# Altium PCB PCB1.PcbDoc
Units mm, origin at the board's own origin, x right, y up, seen from the top; angles counter-clockwise.
Board outline 82.4 x 40.4 mm, 2 copper layers (Top Layer, Bottom Layer); 44 components, 28 nets, 193 pads, 28 vias.
Unrouted connection lines stored in the file: 8.
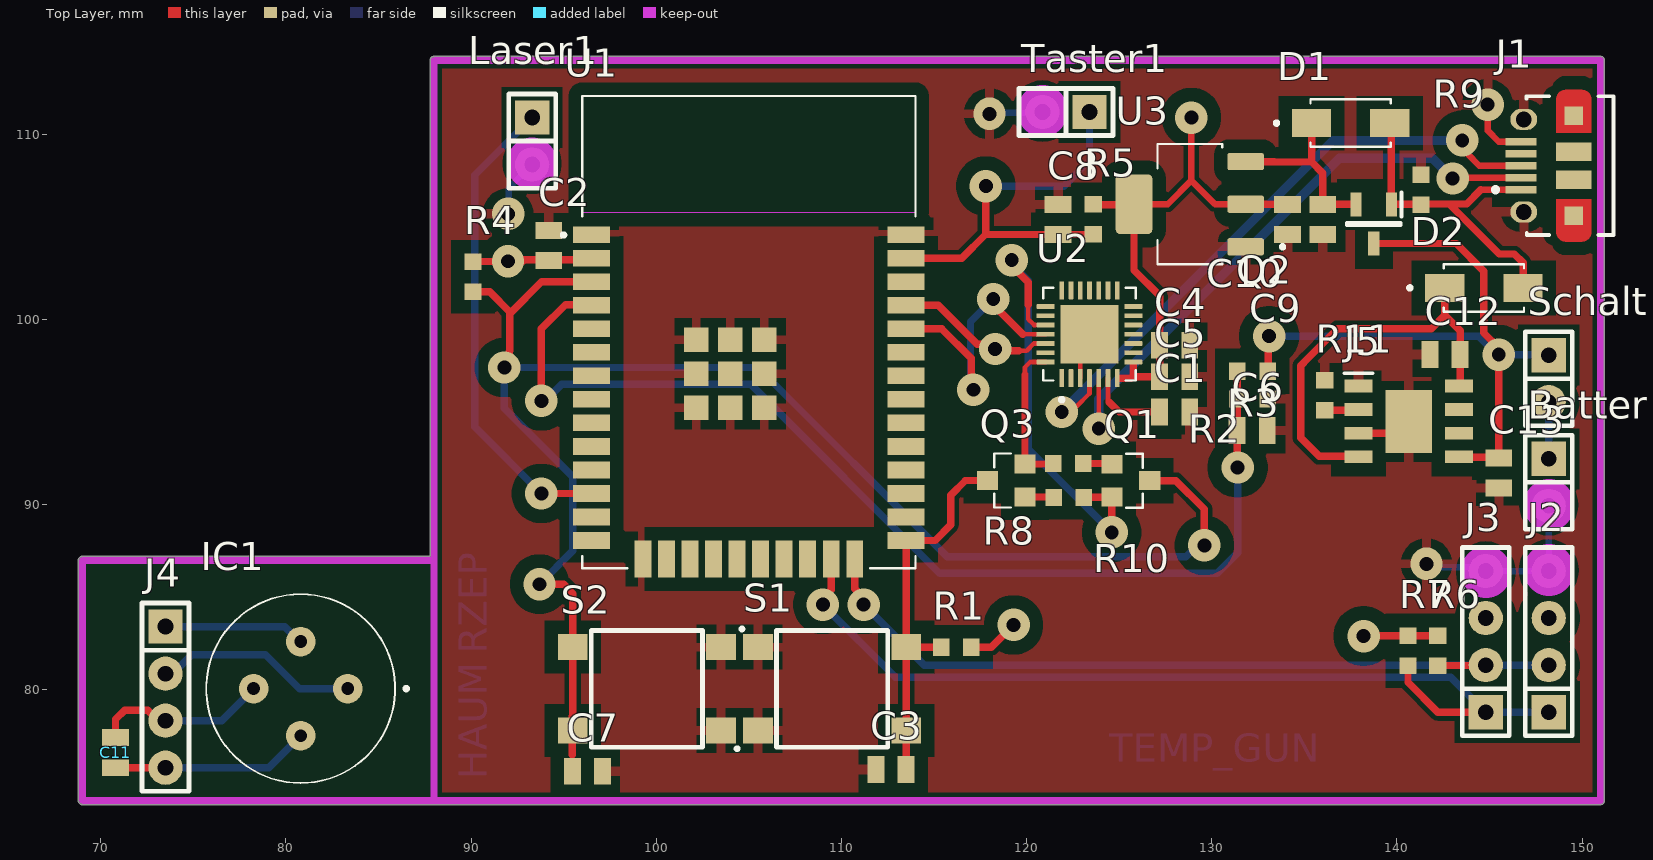
[diagram p0: Top Layer view]
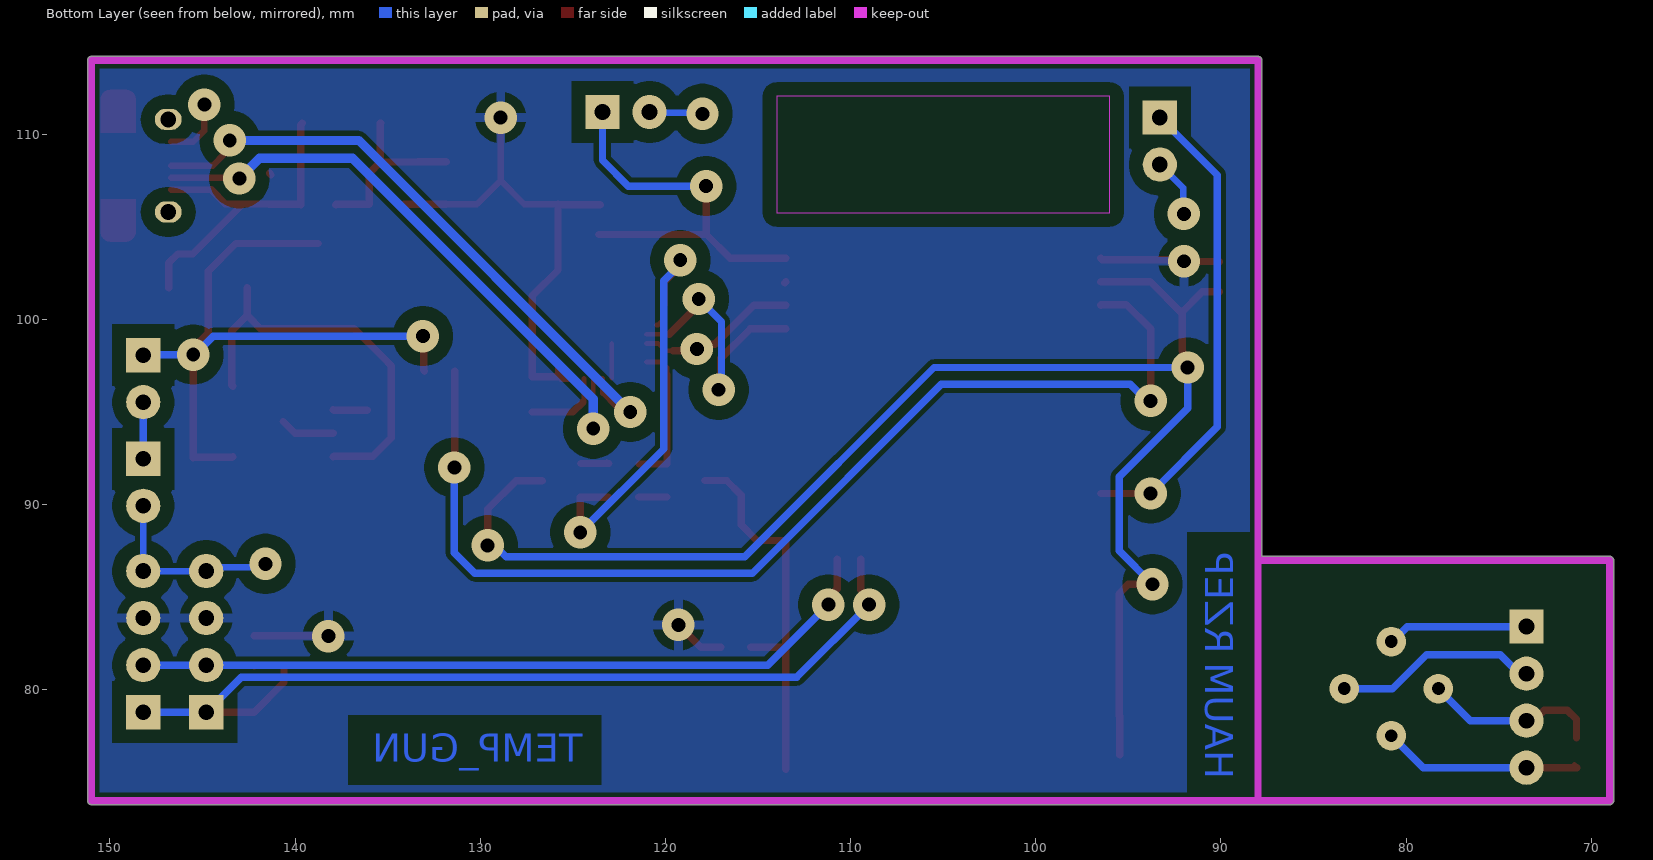
[diagram p1: Bottom Layer view, seen from below]
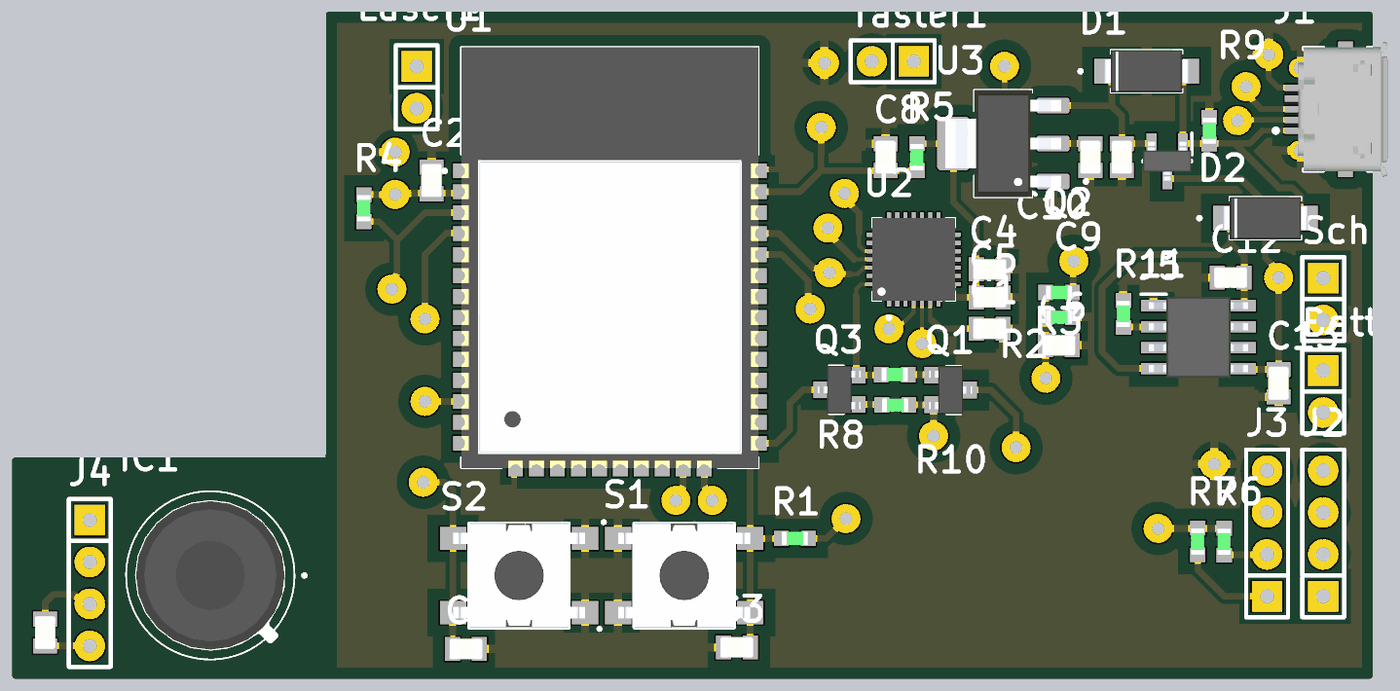
[diagram p2: 3D render of the assembled board from above, using the file's embedded part models]

## Layer stack, top to bottom
Top Solder: solder mask 0.0102, Solder Resist, Dk 3.5
Top Layer: signal copper 0.0356
Dielectric 1: dielectric 0.32, FR-4, Dk 4.8
Bottom Layer: signal copper 0.0356
Bottom Solder: solder mask 0.0102, Solder Resist, Dk 3.5

## Board outline
68.8,74 68.8,87 cw(c69,87) 69,87.2 87.8,87.2 87.8,114 cw(c88,114) 88,114.2 151,114.2 cw(c151,114) 151.2,114 151.2,74 cw(c151,74) 151,73.8 101,73.8 69,73.8 cw(c69,74)

## Design rules (kind name [scope] priority, off if disabled: settings)
Clearance [All] p1: gap=0.74 ignorepadtopadclearanceinfootprint=FALSE except(0.25: Arc-Arc Arc-Track Arc-SMDPad Arc-THPad Arc-Via Arc-Fill Arc-Poly Arc-Region Arc-Text Arc-Hole Track-Track Track-SMDPad Track-THPad Track-Via Track-Fill Track-Poly Track-Region Track-Text Track-Hole; 0.37: SMDPad-SMDPad SMDPad-THPad SMDPad-Via SMDPad-Text SMDPad-Hole THPad-THPad THPad-Via THPad-Text THPad-Hole Via-Via Via-Text Via-Hole Text-Text Text-Hole)
MinimumAnnularRing [All] p1: minimumring=0.5
PlaneConnect PlaneConnect_1 [IsPad AND GND] p1: planeconnectstyle=NoConnect reliefexpansion=0.508 reliefentries=4 reliefconductorwidth=0.254 reliefairgap=0.254
PlaneConnect [All] p2: planeconnectstyle=Relief reliefexpansion=0.508 reliefentries=4 reliefconductorwidth=0.254 reliefairgap=0.254
PolygonConnect [All] p1: connectstyle=Relief reliefconductorwidth=0.5 reliefentries=4 polygonreliefangle="90 Angle" airgapwidth=0.5
RoutingVias [All] p1: holewidth=0.85 width=1.45 viastyle="Through Hole" minholewidth=0.65 minwidth=1.25 maxholewidth=1.45 maxwidth=2.05
SolderMaskExpansion [All] p1: expansion=0.102 istentingtop=FALSE
Width [All] p1: maxlimit=6 minlimit=0.25 preferedwidth=0.4
29 further rules are at their usual default settings.

## Components (designator, comment, footprint, x,y, rotation, side; value= is the part's Value field where it differs from the comment)
Batterie1 "CON2" SIP-2 148.2,91.2 r270 top
C1 "1uF" CAPC2013X140N 128,95 r180 top
C2 "47uF" CAPC2013X140N 94.2,103.987 r270 top
C3 "10nF" CAPC2013X140N 112.687,75.7 r0 top
C4 "10uF" CAPC2013X140N 128,98.6 r0 top
C5 "100nF" CAPC2013X140N 128,96.9 r0 top
C6 "10nF" CAPC2013X140N 132.187,94 r180 top
C7 "10nF" CAPC2013X140N 96.287,75.6 r180 top
C8 "10nF" CAPC2013X140N 121.7,105.4 r270 top
C9 "47uF" CAPC2013X140N 136,105.4 r90 top
C10 "10uF" CAPC2013X140N 134.1,105.4 r90 top
C11 "0.1uF" CAPC2013X140N 70.8,76.6 r90 top
C12 "10uF" CAPC2013X140N 142.6,98.1 r0 top
C13 "10uF" CAPC2013X140N 145.5,91.7 r90 top
D1 "SS14" DIOM4325X250N 137.5,110.6 r0 top
D2 "SS14" DIOM4325X250N 144.7,101.7 r0 top
IC1 "MLX90614ESF-DCC-000-SP" MLX90614ESFDCC000SP 83.34,80.06 r270 top
J1 "47589-0001" "USB-MICRO-B_V - RZEP_CN" 148.2,108.3 r90 top
J2 "DISPLAY" Sip-4 148.2,82.6 r90 top
J3 "SENSOR" Sip-4 144.8,82.6 r90 top
J4 "CON4" Sip-4 73.5,79.6 r270 top
J5 "TP4056" SOIC127P600X175-9N 140.642,94.487 r0 top
Laser1 "CON2" SIP-2 93.3,109.63 r270 top
Q1 "SMD-TRANSISTORS-NPN-25V-500MW(SOT-23)" SOT-23 125.633,91.292 r270 top
Q2 "SI2351DS-T1-E3" SOT95P237X112-3N 138.75,105.15 r270 top
Q3 "SMD-TRANSISTORS-NPN-25V-500MW(SOT-23)" SOT-23 118.9,91.3 r90 top
R1 "24k" RESC1608X55N 116.2,82.3 r180 top
R2 "1M" RESC1608X55N 132.2,97.2 r0 top
R3 "1M" RESC1608X55N 132.2,95.7 r180 top
R4 "24k" RESC1608X55N 90.1,102.3 r270 top
R5 "24k" RESC1608X55N 123.6,105.4 r270 top
R6 "24k" RESC1608X55N 142.2,82.1 r270 top
R7 "24k" RESC1608X55N 140.6,82.114 r270 top
R8 "12k" RESC1608X55N 122.249,92.219 r180 top
R9 "24k" RESC1608X55N 141.3,107 r270 top
R10 "12k" RESC1608X55N 122.28,90.385 r0 top
R11 "2k4" RESC1608X55N 136.1,95.9 r270 top
S1 "B3FS-1000P" B3FS-1000P 109.5,80.05 r180 top
S2 "B3FS-1000P" B3FS-1000P 99.5,80.05 r0 top
Schalter1 "CON2" SIP-2 148.2,96.8 r270 top
Taster1 "CON2" SIP-2 122.13,111.2 r180 top
U1 "ESP32-WROOM-32" MODULE_ESP32-WROOM-32 105,99.31 r0 top
U2 "CP2102" QFN50P500X500X100-29N 123.4,99.2 r90 top
U3 "LDL1117S12R" SOT230P700X180-4N 128.819,106.22 r180 top

## Footprints (in the part's own frame and the unit in brackets; to place one, negate y for a bottom-side part, rotate by r counter-clockwise, add the part's x,y. Pads: shape width x height; smd on the part's side, far side on the other; paste and mask are expansions set on the pad)
B3FS-1000P [mm]
  rect 1.6x1.4 smd: 1(4,-2.25) 2(-4,-2.25) 3(4,2.25) 4(-4,2.25)
  silkscreen extent -3,-3.29 4.93,3.15, body extent -4,-3.25 4,3.25, height 3.1
CAPC2013X140N [mil]
  rect 36x57 smd: 1(-32,0) 2(32,0)
  body extent -40,-25 40,25, height 53
DIOM4325X250N [mm]
  rect 2.12x1.5 smd: A(2.115,0) C(-2.115,0)
  silkscreen extent -4.1,-1.28 2.16,1.28, body extent -2.57,-1.28 2.57,1.28, height 2.5
MLX90614ESFDCC000SP [mm]
  round 1.6 hole 0.69: 1(0,0) 2(-2.54,-2.54) 3(0,-5.08) 4(2.54,-2.54)
  silkscreen extent -5.1,-7.64 5.1,3.26, body extent -4.56,-7.1 4.56,2.02, height 17.35
MODULE_ESP32-WROOM-32 [mm]
  rect 2x0.9 smd: 1(-8.5,5.26) 2(-8.5,3.99) 3(-8.5,2.72) 4(-8.5,1.45) 5(-8.5,0.18) 6(-8.5,-1.09) 7(-8.5,-2.36) 8(-8.5,-3.63) 9(-8.5,-4.9) 10(-8.5,-6.17) 11(-8.5,-7.44) 12(-8.5,-8.71) 13(-8.5,-9.98) 14(-8.5,-11.25) 25(8.5,-11.25) 26(8.5,-9.98) 27(8.5,-8.71) 28(8.5,-7.44) 29(8.5,-6.17) 30(8.5,-4.9) 31(8.5,-3.63) 32(8.5,-2.36) 33(8.5,-1.09) 34(8.5,0.18) 35(8.5,1.45) 36(8.5,2.72) 37(8.5,3.99) 38(8.5,5.26)
  rect 0.9x2 smd: 15(-5.715,-12.25) 16(-4.445,-12.25) 17(-3.175,-12.25) 18(-1.905,-12.25) 19(-0.635,-12.25) 20(0.635,-12.25) 21(1.905,-12.25) 22(3.175,-12.25) 23(4.445,-12.25) 24(5.715,-12.25)
  rect 1.33x1.33 smd: 39(-2.835,-4.075) 39(-2.835,-2.24) 39(-2.835,-0.405) 39(-1,-4.075) 39(-1,-2.24) 39(-1,-0.405) 39(0.835,-4.075) 39(0.835,-2.24) 39(0.835,-0.405)
  Keep-Out Layer region: 9,6.45 -9,6.45 -9,12.75 9,12.75
  Keep-Out Layer region: 9,6.45 -9,6.45 -9,12.75 9,12.75
  silkscreen extent -10.1,-12.75 9,12.75, body extent -9,-12.75 9,12.75, height 3.2
QFN50P500X500X100-29N [mm]
  rrect25% 0.97x0.26 smd: 1(-2.37,1.5) 2(-2.37,1) 3(-2.37,0.5) 4(-2.37,0) 5(-2.37,-0.5) 6(-2.37,-1) 7(-2.37,-1.5) 15(2.37,-1.5) 16(2.37,-1) 17(2.37,-0.5) 18(2.37,0) 19(2.37,0.5) 20(2.37,1) 21(2.37,1.5)
  rrect25% 0.26x0.97 smd: 8(-1.5,-2.37) 9(-1,-2.37) 10(-0.5,-2.37) 11(0,-2.37) 12(0.5,-2.37) 13(1,-2.37) 14(1.5,-2.37) 22(1.5,2.37) 23(1,2.37) 24(0.5,2.37) 25(0,2.37) 26(-0.5,2.37) 27(-1,2.37) 28(-1.5,2.37)
  rect 3.15x3.15 smd paste-575: 29(0,0)
  silkscreen extent -3.64,-2.5 2.5,2.5, body extent -2.5,-2.5 2.5,2.5, height 1
RESC1608X55N [mm]
  rect 0.89x0.93 smd: 1(-0.814,0) 2(0.814,0)
  body extent -0.8,-0.4 0.8,0.4, height 0.55
SIP-2 [mm]
  rect 1.85x1.85 hole 0.85: 1(-1.27,0)
  round 1.85 hole 0.85: 2(1.27,0)
  silkscreen extent -2.54,-1.27 2.54,1.27
Sip-4 [mm]
  rect 1.85x1.85 hole 0.85: 1(-3.81,0)
  round 1.85 hole 0.85: 2(-1.27,0) 3(1.27,0) 4(3.81,0)
  silkscreen extent -5.08,-1.27 5.08,1.27
SOIC127P600X175-9N [mm]
  rect 1.525x0.7 smd: 1(-2.712,1.905) 2(-2.712,0.635) 3(-2.712,-0.635) 4(-2.712,-1.905) 5(2.712,-1.905) 6(2.712,-0.635) 7(2.712,0.635) 8(2.712,1.905)
  rect 2.513x3.402 smd: 9(0,0)
  silkscreen extent -3.47,2.61 -1.95,2.61, body extent -3,-2.45 3,2.45, height 1.75
SOT95P237X112-3N [mm]
  rect 1.3x0.6 smd: 1(-1.05,0.95) 2(-1.05,-0.95) 3(1.05,0)
  silkscreen extent -1.7,-1.46 0.05,1.5, body extent -1.18,-1.46 1.18,1.46, height 1.12
SOT230P700X180-4N [mm]
  rrect25% 1.98x0.93 smd: 1(-3.015,2.3) 2(-3.015,0) 3(-3.015,-2.3)
  rrect25% 1.98x3.23 smd: 4(3.015,0)
  silkscreen extent -5.1,-3.25 1.75,3.25, body extent -3.5,-3.25 3.5,3.25, height 1.8
SOT-23 [mil]
  rect 40x45 smd: 1(-35,-40) 2(35,-40) 3(0,40)
  silkscreen extent -58,-10 58,25, body extent -57,-51 57,51, height 55
"USB-MICRO-B_V - RZEP_CN" [mm] "USB, MICRO B, Body 7.491x4.695 mm, Pitch 0.65 mm"
  rect 0.4x1.65 smd: 1(-1.3,1.5) 2(-0.65,1.5) 3(0,1.5) 4(0.65,1.5) 5(1.3,1.5)
  oval 1.15x1.45 hole 0.85: 6(-2.5,1.35) 7(2.5,1.35)
  rect 1x1 smd: 8(-2.7,-1.35) 11(2.7,-1.35)
  rect 1x1.9 smd: 9(-0.75,-1.35) 10(0.75,-1.35)
  Top Layer circle w0.5: c-3.6,-1.8 r0.25
  Top Layer circle w0.5: c-3.6,-0.9 r0.25
  Top Layer circle w0.5: c3.6,-1.8 r0.25
  Top Layer circle w0.5: c3.6,-0.9 r0.25
  Top Layer region: -1.8,-2.3 -1.8,-0.4 -3.6,-0.4 -3.6,-2.3
  Top Layer region: -3.6,-1.8 -3.6,-0.9 -4.1,-0.9 -4.1,-1.8
  Top Layer region: 1.775,-0.4 1.775,-2.3 3.6,-2.3 3.6,-0.4
  Top Layer region: 3.6,-0.9 3.6,-1.8 4.1,-1.8 4.1,-0.9
  silkscreen extent -3.75,-3.5 3.75,3, body extent -4.1,-3.9 4.1,1.5, height 2.67

## Part data
Batterie1 J4 Laser1 Schalter1 Taster1: "Stecker"
C1 C2 C3 C4 C5 C6 C7 C8 C9 C10 C11 C12 C13: library part 08053D106KAT2A, "Capacitor", Manufacturer_Name="Kyocera AVX", Mouser Part Number=581-08053D106KAT2A, Arrow Part Number=08053D106KAT2A, Arrow Price/Stock=https://www.arrow.com/en/products/08053d106kat2a/avx, Datasheet Link=http://componentsearchengine.com/Datasheets/1/08053D106KAT2A.pdf, Manufacturer_Part_Number=08053D106KAT2A, Mouser Price/Stock=https://www.mouser.co.uk/ProductDetail/AVX/08053D106KAT2A?qs=RC%2FTMc7rOJbkID75Q0PA3w%3D%3D
D1 D2 U3: Package=None, Availability=Unavailable, Price=None
  D1 D2: MF="{'manufacturer': u'Taiwan Semiconductor'}", MP=SS14
  U3: MF="{'manufacturer': u'STMicroelectronics'}", MP=LDL1117S12R
IC1: "Integrated Circuit", Manufacturer_Name=Melexis, Mouser Part Number=482-90614ESFDCC000SP, Arrow Part Number=MLX90614ESF-DCC-000-SP, Arrow Price/Stock=https://www.arrow.com/en/products/mlx90614esf-dcc-000-sp/melexis?region=nac, Datasheet Link=https://www.mouser.com/datasheet/2/734/MLX90614-Datasheet-Melexis-953298.pdf, Height=17.35mm, Manufacturer_Part_Number=MLX90614ESF-DCC-000-SP, Mouser Price/Stock=https://www.mouser.co.uk/ProductDetail/Melexis/MLX90614ESF-DCC-000-SP?qs=KuGPmAKtFKVd5ey8TnlzAw%3D%3D
J1: library part USB_CMP-2000-05610-1, "Right Angle Female Type AB Micro USB Connector, 30 V, 1.8 A, -30 to 85 degC, RoHS, Tape and Reel", Color=Black, Current Rating=1.8A, Manufacturer=Molex, Operating Temperature Range=-20Cto+85C, Package Description="Micro USB Connector, Pitch 0.65 mm, 5 Positions, Body 7.5 x 5.6 mm", Voltage Rating=30VAC, Brand=Molex, Connector Type=MicroUSBTypeABreceptacle, Contact Material=CopperAlloy, Contact Plating=Gold, Datasheet URL=http://www.molex.com/webdocs/datasheets/pdf/en-us/0475890001_IO_CONNECTORS.pdf, Datasheet Version=12/2016, Gender=Female, Manufacturer URL=http://www.molex.com/, Mounting Angle=Right, Mounting Technology=SurfaceMount, Number of Contacts=5Contact, Number of Ports=1Port, Package Reference=47589-0001, Package URL=http://www.molex.com/pdm_docs/sd/475890001_sd.pdf, Packaging=Reel, Product=MicroUSBTypeABConnectors, Product Category=USBConnectors, RoHS=True, Series=47589, Standard=USB, Termination Style=SMD/SMT
J2 J3: library part CON4, "Stecker"
J5: "Connector", Manufacturer_Name="NanJing Top Power", Datasheet Link=https://dlnmh9ip6v2uc.cloudfront.net/datasheets/Prototyping/TP4056.pdf, Height=1.75mm, Manufacturer_Part_Number=TP4056
Q1 Q3: "305010017", Package=None, Availability=Unavailable, MF="{'manufacturer': u'MDD'}", MP=S8050, Price=None
Q2: "MOSFET (P-Channel)", Manufacturer_Name=Vishay, Mouser Part Number=781-SI2351DS-E3, Datasheet Link=http://www.vishay.com/docs/73702/si2351ds.pdf, Height=1.12mm, Manufacturer_Part_Number=SI2351DS-T1-E3, Mouser Price/Stock=https://www.mouser.co.uk/ProductDetail/Vishay-Siliconix/SI2351DS-T1-E3?qs=G1LhLIAbs1wtac0vldSihQ%3D%3D
R1 R2 R3 R4 R5 R6 R7 R8 R9 R10 R11: library part RES, "Widerstand"
S1 S2: "Switch", Manufacturer_Name="Omron Electronics", Mouser Part Number=653-B3FS-1000P, Arrow Part Number=B3FS-1000P, Arrow Price/Stock=https://www.arrow.com/en/products/b3fs-1000p/omron?region=nac, Datasheet Link=https://www.omron.co.jp/ecb/products/pdf/b3fs.pdf, Manufacturer_Part_Number=B3FS-1000P, Mouser Price/Stock=https://www.mouser.co.uk/ProductDetail/Omron-Electronics/B3FS-1000P?qs=ImaqFqjHA4k6odVF2%2FXWpQ%3D%3D
U1: "Bluetooth, WiFi 802.11b/g/n, Bluetooth v4.2 +EDR, Class 1, 2 and 3 Transceiver Module 2.4GHz ~ 2.5GHz Antenna Not Included, U.FL Surface Mount", Package="Module Espressif Systems", Availability="In Stock", Check_prices=https://www.snapeda.com/parts/ESP32-WROOM-32/Espressif+Systems/view-part/?ref=eda, MF="Espressif Systems", MP=ESP32-WROOM-32, Price=None, Purchase-URL=https://pricing.snapeda.com/search/part/ESP32-WROOM-32/?ref=eda, SnapEDA_Link=https://www.snapeda.com/parts/ESP32-WROOM-32/Espressif+Systems/view-part/?ref=snap
U2: "USB to UART Bridge", Package=None, Availability=Unavailable, MF="{'manufacturer': u'Silicon Labs'}", MP=CP2102, Price=None

## Via types
v1: diameter 1.75, hole 0.75, Top Layer to Bottom Layer, 28 vias

## Nets (pads, with @x,y where several pads share a name; then routed paths per layer and width w, separated by ;. In a path a pad name is that pad's centre, name@x,y a point inside that pad or via, vN(x,y) a via of type N, cw(c..) or ccw(c..) an arc to the next point about the centre after c; other vN are vias at no path point)
+3,3V: C2.2 C4.1 C5.1 C10.2 J2.3 J3.3 R1.1 R4.1 R5.1 R6.1 R7.1 U1.2 U2.7 U2.8 U3.2 U3.4 | length 40.4
  Top Layer w0.35: U3.4 127.62,106.22 128.9,107.5 ; v1(128.9,110.9) 128.9,107.5 ; U3.2 130.18,106.22 128.9,107.5
  Top Layer w0.4: R4.1 90.112,103.126 91.984,103.126 v1(91.996,103.137) ; v1@92.796,103.137 92.877,103.219 96.419,103.219 U1.2 ; R1.1 118.1,82.3 v1(119.3,83.5) ; R5.1@123.514,106.2 125.784,106.2 U3.4 125.804,102.658 127.187,101.275 C4.1 C5.1 125.7,96.9 ; U2.7@125,96.83 125.63,96.83 125.7,96.9 ; U2.8@125.77,97.6 125.77,96.97 125.7,96.9 ; U3.2 131.838,106.216 134.096,106.216 C10.2 ; v1(138.2,82.9) 138.207,82.907 142.193,82.907 R6.1
A0: C6.2 R2.1 R3.2 U1.4 | length 59.6
  Top Layer w0.4: v1(93.8,95.6) 93.8,99.5 95.1,100.8 96.46,100.8 U1.4 ; R2.1 R3.2 131.38,95.694 131.38,94.006 C6.2 131.387,93.987 131.387,92.013 v1(131.4,92)
  Bottom Layer w0.4: v1(93.8,95.6) 94.009,95.6 94.909,96.5 105.1,96.5 115.3,86.3 130.3,86.3 131.4,87.4 v1(131.4,92)
D_N: J1.2 U2.5 | length 33
  Top Layer w0.25: v1(123.9,94.1) U2.5
  Top Layer w0.35: v1(143.011,107.611) 143.05,107.65 J1.2
  Bottom Layer w0.5: v1(123.9,94.1) 123.9,95.7 136.9,108.7 141.922,108.7 v1(143.011,107.611)
D_P: J1.3 U2.4 | length 34.4
  Top Layer w0.25: v1(121.9,95) 122.187,95.287 122.687,95.287 123.4,96 U2.4
  Top Layer w0.35: v1(143.53,109.666) 143.798,109.398 143.798,108.955 144.453,108.3 J1.3
  Bottom Layer w0.5: v1(121.9,95) 136.566,109.666 v1(143.53,109.666)
DTR: Q3.2 R8.2 U2.28 | length 8
  Top Layer w0.25: 119.916,97 119.916,97.416 120.2,97.7 U2.28
  Top Layer w0.254: R8.2@121.404,92.189 R8.2 R8.2@121.452,92.236
  Top Layer w0.4: 119.916,97 Q3.2 R8.2@121.404,92.189
EN: C7.2 Q1.3 R4.2 S2.2 S2.4 U1.3 | length 83.2
  Top Layer w0.4: R4.2 91.014,101.486 92.1,100.4 92.1,98.309 92.058,98.268 92.058,97.658 v1(91.8,97.4) ; 92.139,100.361 93.808,102.03 95.2,102.03 U1.3 ; v1(93.7,85.7) 95,85.7 95.5,85.2 S2.4 95.5,78.6 95.474,78.574 95.474,76.5 ; Q1.3 128.066,91.292 129.6,89.758 v1(129.6,87.8)
  Bottom Layer w0.4: v1(93.7,85.7) 95.5,87.5 95.5,91.5 91.8,95.2 v1(91.8,97.4) 105.495,97.4 115.72,87.175 128.61,87.175 129.235,87.8 v1(129.6,87.8)
GND: Batterie1.2 C1.1 C2.1 C3.1 C4.2 C5.2 C6.1 C7.1 C8.1 C9.1 C10.1 C12.1 C13.1 J1.5 J1.6 J1.7 J1.8 J1.9 J1.10 J1.11 J2.4 J3.4 J5.1 J5.3 J5.9 Laser1.2 R3.1 R9.1 R11.1 S1.1 S1.3 S2.1 S2.3 Taster1.2 U1.1 U1.15 U1.38 U1.39 U2.3 U2.29 U3.1 | length 21.6
  Top Layer w0.25: U2.3 U2.29@122.9,98.7
  Top Layer w0.35: v1(144.9,111.6) 144.9,110.2 145.5,109.6 J1.5
  Top Layer w0.4: J5.3 140.007,93.852 J5.9 ; R9.1 R9.1@141.378,107.892
  Bottom Layer w0.35: v1(118,111.1) 118.05,111.15 120.81,111.15 Taster1.2 ; v1(141.6,86.8) 141.795,86.605 144.605,86.605 J3.4 J2.4 Batterie1.2
  other v1: 92,105.7
IO0: C3.2 Q3.3 R1.2 S1.2 S1.4 U1.25 | length 20.9
  Top Layer w0.4: C3.2 S1.4 S1.2@113.5,82.25 ; R1.2 S1.2 U1.25 115.06,88.06 115.9,88.9 115.9,90.5 116.7,91.3 Q3.3
Laser: Laser1.1 U1.12 | length 25.8
  Top Layer w0.4: v1(93.8,90.6) U1.12
  Bottom Layer w0.4: Laser1.1 90.2,107.8 90.2,94.2 v1(93.8,90.6)
NetBatterie1_1: Batterie1.1 Schalter1.2 | length 3.1
  Bottom Layer w0.4: Batterie1.1 Schalter1.2
NetC1_2: C1.2 U2.6 | length 4.6
  Top Layer w0.25: U2.6 124.4,95.6 124.738,95.263
  Top Layer w0.4: 124.475,95.525 125,95 C1.2
NetC9_2: C9.2 D1.C Q2.2 U3.3 | length 10
  Top Layer w0.4: U3.3 133.38,108.52 133.4,108.5 135.4,108.5 ; D1.C 135.4,110.585 135.4,108.5 ; Q2.2 137.787,106.213 C9.2 136,107.9 135.4,108.5
NetC11_1: C11.1 IC1.4 J4.4 | length 10.9
  Top Layer w0.254: C11.1@70.8,75.838 C11.1@70.927,75.965
  Top Layer w0.4: C11.1@70.796,75.784 C11.1 70.801,75.789 73.499,75.789 J4.4
  Bottom Layer w0.4: J4.4 79.07,75.79 IC1.4
NetC11_2: C11.2 IC1.3 J4.3 | length 9.6
  Top Layer w0.4: C11.2 70.8,78.4 71.3,78.9 72.538,78.9 73.108,78.33 J4.3
  Bottom Layer w0.4: J4.3 76.53,78.33 IC1.3
NetC12_2: C12.2 D2.C J5.4 J5.8 | length 22
  Top Layer w0.4: 135.777,98.48 135.2,97.903 135.2,97.9 134.8,97.5 134.8,93.6 135.8,92.6 137.912,92.6 J5.4 ; 135.78,98.48 136.8,99.5 141.87,99.5 142.585,100.215 ; D2.C 142.585,100.215 ; J5.8@143.356,96.39 J5.8 143.413,96.451 C12.2 143.413,99.387 142.585,100.215
NetIC1_1: IC1.1 J4.2 | length 11
  Bottom Layer w0.4: J4.2 73.892,80.87 74.922,81.9 78.9,81.9 80.74,80.06 IC1.1
NetIC1_2: IC1.2 J4.1 | length 7.6
  Bottom Layer w0.4: J4.1 79.94,83.41 80.75,82.6 IC1.2
NetJ5_2: J5.2 R11.2 | length 1.8
  Top Layer w0.4: R11.2 136.118,95.104 137.912,95.104 J5.2
NetQ1_1: Q1.1 R8.1 | length 1.7
  Top Layer w0.254: R8.1 R8.1@123.174,92.33 ; Q1.1@124.578,92.219 Q1.1
  Top Layer w0.4: R8.1 Q1.1@124.578,92.219
NetQ3_1: Q3.1 R10.1 | length 1.6
  Top Layer w0.254: R10.1@121.441,90.411 R10.1
  Top Layer w0.4: Q3.1 R10.1@121.441,90.411
RTS: Q1.2 R10.2 U2.24 | length 24.4
  Top Layer w0.25: 120.1,100.8 120.1,100.004 120.404,99.7 120.488,99.7
  Top Layer w0.254: Q1.2@124.599,90.385 124.6,90.387 Q1.2
  Top Layer w0.4: v1(119.2,103.2) 119.2,102.904 120.095,102.009 120.095,100.8 ; R10.2 Q1.2@124.599,90.385 ; v1(124.6,88.5) Q1.2@124.6,90.387
  Bottom Layer w0.4: v1(119.2,103.2) 119.2,102.991 120.1,102.091 120.1,93 v1(124.6,88.5)
RXD: U1.34 U2.25 | length 15.2
  Top Layer w0.25: 119.8,99.2 U2.25
  Top Layer w0.4: U1.34 115.41,99.49 117.007,97.893 117.007,96.318 v1(117.125,96.2) ; v1(118.2,101.1) 118.2,100.8 119.8,99.2
  Bottom Layer w0.4: v1(117.125,96.2) 116.975,96.35 116.975,99.875 v1(118.2,101.1)
SCL: J2.2 J3.2 R6.2 U1.24 | length 43.4
  Top Layer w0.4: U1.24 110.715,85.45 111.2,84.965 v1(111.2,84.6) ; R6.2 142.222,81.308 144.778,81.308 J3.2
  Bottom Layer w0.4: v1(111.2,84.6) 114.47,81.33 J3.2 ; J3.2@145.03,81.33 J2.2
SDA: J2.1 J3.1 R7.2 U1.23 | length 50
  Top Layer w0.4: v1(109,84.6) 109,84.965 109.445,85.41 U1.23 ; R7.2 140.6,80.4 142.21,78.79 J3.1
  Bottom Layer w0.4: v1(109,84.6) 112.92,80.68 142.91,80.68 J3.1 J2.1
T: C8.2 R5.2 Taster1.1 U1.37 | length 22
  Top Layer w0.4: U1.37 116.5,103.3 117.786,104.586 ; v1(117.8,107.2) 117.8,105.588 117.786,105.574 117.786,104.586 ; R5.2 C8.2 117.786,104.586
  Bottom Layer w0.4: v1(117.8,107.2) 122,107.2 123.4,108.6 Taster1.1
TXD: U1.35 U2.26 | length 8.7
  Top Layer w0.25: 119.568,98.3 120,98.3 120.4,98.7 U2.26
  Top Layer w0.4: U1.35 115.24,100.76 117.342,98.658 118.042,98.658 118.4,98.3 119.568,98.3
  other v1: 118.3,98.4
VB: C13.2 J5.5 Q2.3 R2.2 Schalter1.1 | length 36.6
  Top Layer w0.4: R2.2 133.057,97.243 133.057,99.057 v1(133.1,99.1) ; Q2.3 143.2,104.1 144.7,102.6 144.7,99.265 145.5,98.465 v1(145.5,98.1) C13.2 145.465,92.547 143.389,92.547 J5.5
  Bottom Layer w0.4: v1(133.1,99.1) 144.414,99.1 145.414,98.1 v1(145.5,98.1) 148.17,98.1 Schalter1.1
VUSB: D1.A D2.A J1.1 Q2.1 R9.2 | length 18.4
  Top Layer w0.35: 144.531,107 J1.1
  Top Layer w0.4: D1.A 139.7,110.515 Q2.1 139.714,106.214 141.4,106.214 141.417,106.231 142.831,106.231 ; 144.531,107 143.762,106.231 142.831,106.231 ; D2.A 146.815,103.051 146.336,103.53 145.532,103.53 142.831,106.231
pads on no net: J1.4 J5.6 J5.7 U1.5 U1.6 U1.7 U1.8 U1.9 U1.10 U1.11 U1.13 U1.14 U1.16 U1.17 U1.18 U1.19 U1.20 U1.21 U1.22 U1.26 U1.27 U1.28 U1.29 U1.30 U1.31 U1.32 U1.33 U1.36 U2.1 U2.2 U2.9 U2.10 U2.11 U2.12 U2.13 U2.14 U2.15 U2.16 U2.17 U2.18 U2.19 U2.20 U2.21 U2.22 U2.23 U2.27
copper on no net: | length 3.3
  Top Layer w0.4: 113.5,102.03 113.565,101.965
  Bottom Layer w0.35: 92,105.7 92.04,105.74 92.04,107.1 93.3,108.36

## Polygon pours and split planes (outlines as drawn)
GND on Top Layer "GND_L01_P001" (solid, remove dead copper, pour order 1): 88.1,114 150.8,114 150.8,74 154.2,70 150.8,74 88.1,74
+3,3V on Bottom Layer "+3,3V_L02_P000" (solid, remove dead copper, pour order 0): 88.1,114 150.8,114 150.8,74 154.2,70 150.8,74 88.1,74

## Keep-outs
Top Layer:
  lines w2.7: 93.3,108.36 93.3,108.46 ; 120.86,111.2 120.86,111.3 ; 144.8,86.31 144.8,86.41 ; 148.2,86.41 148.2,86.51 ; 148.2,89.93 148.2,90.03
Keep-Out Layer:
  lines w0.4: 88,100 88,114 151,114 151,74 101,74 88,74 ; 88,103 88,87 ; 88,74 88,87 ; 88,74 69,74 69,87 71,87 88,87 ; 88,87 88,87 ; 88,87 88,87

## Other copper
Bottom Layer:
  text "RZEP" at 90.846,81.954 h1.52 r90
  text "TEMP_GUN" at 124.454,76.108 h1.52
  text "HAUM" at 90.846,75.154 h1.52 r90

## Text inside footprints (layer, text, board x,y; h text height)
J1: Mechanical 1 "PCB EDGE" at 151.1,101.1 h0.3 r90
U1: Top 3D Body "ANTENNA" at 99,108.31 h1.78